# Altium PCB PCB1.PcbDoc
Units mil, origin at the board's own origin, x right, y up, seen from the top; angles counter-clockwise.
Board outline 10000 x 5964.57 mil, 2 copper layers (Top Layer, Bottom Layer); 127 components, 82 nets, 489 pads, 172 vias.
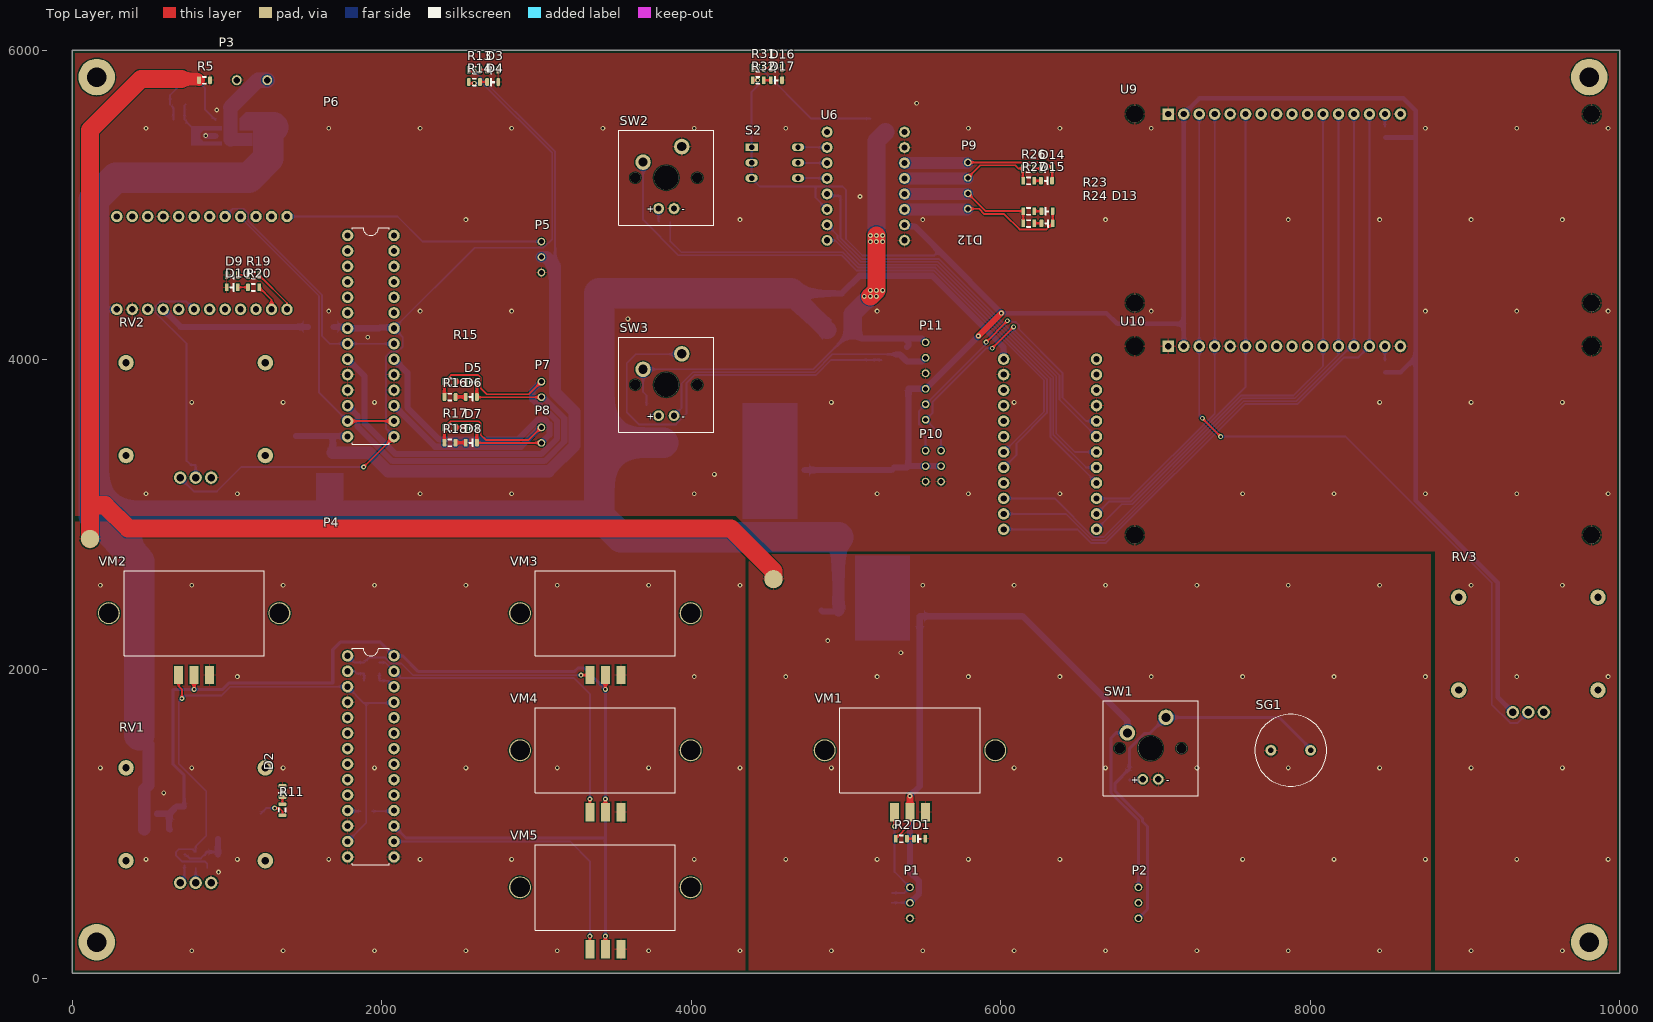
[diagram p0: Top Layer view]
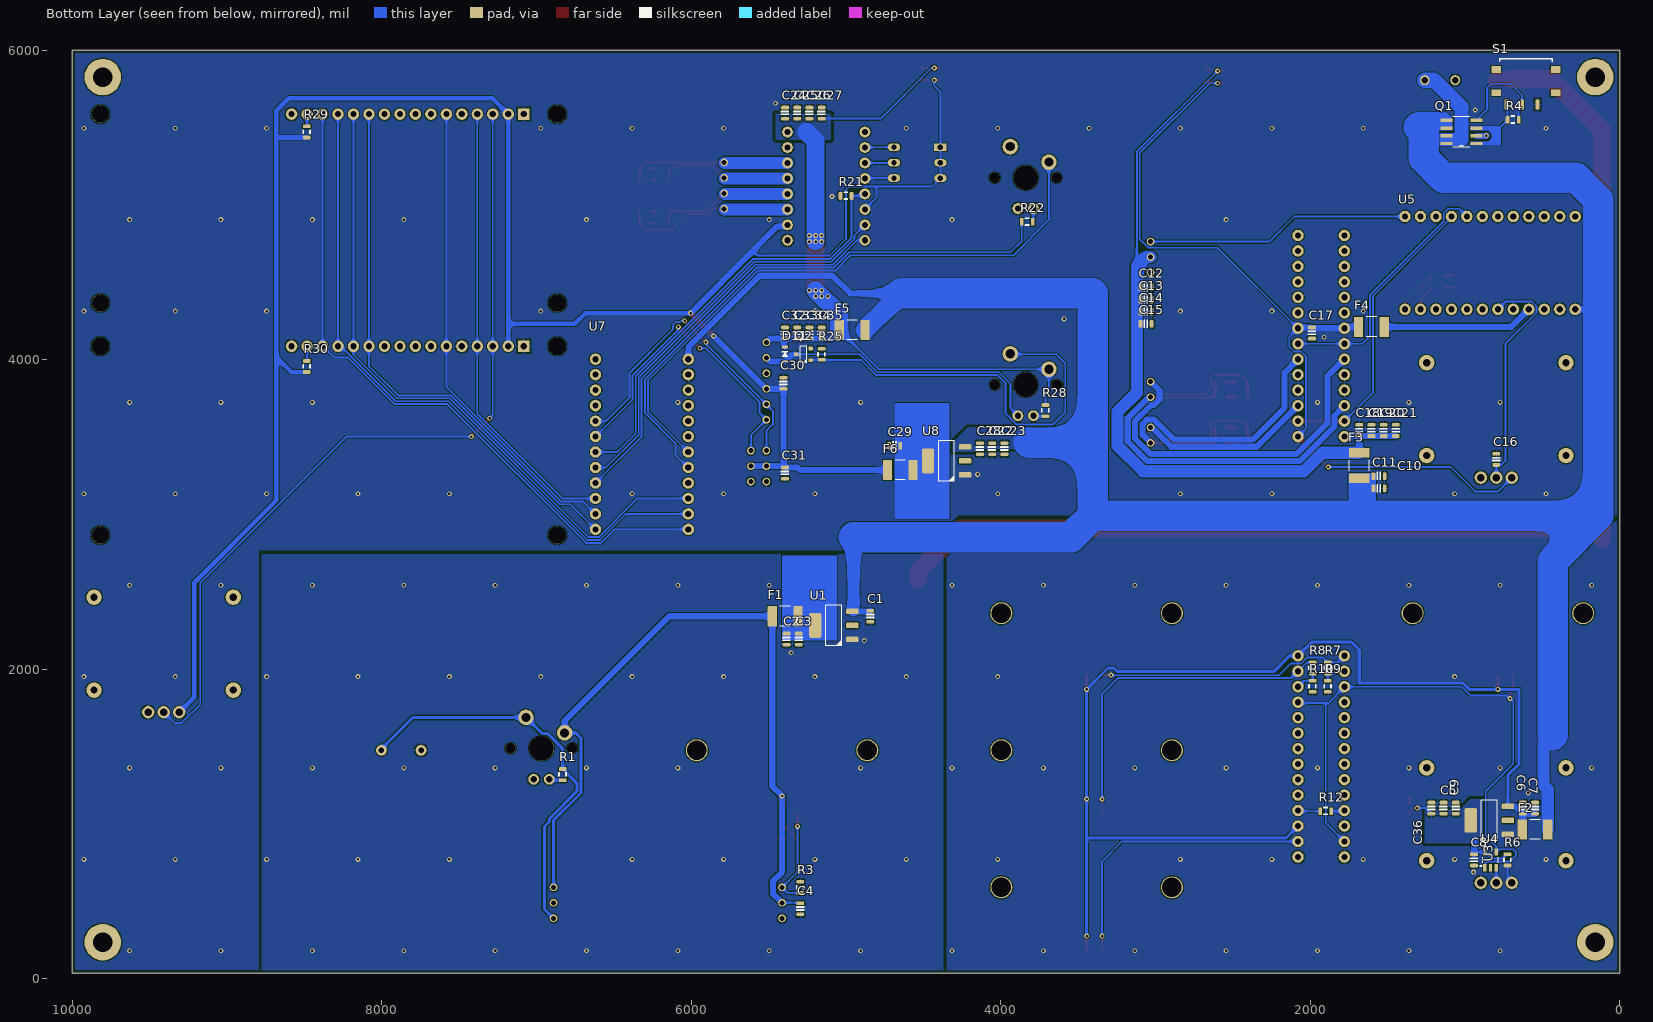
[diagram p1: Bottom Layer view, seen from below]
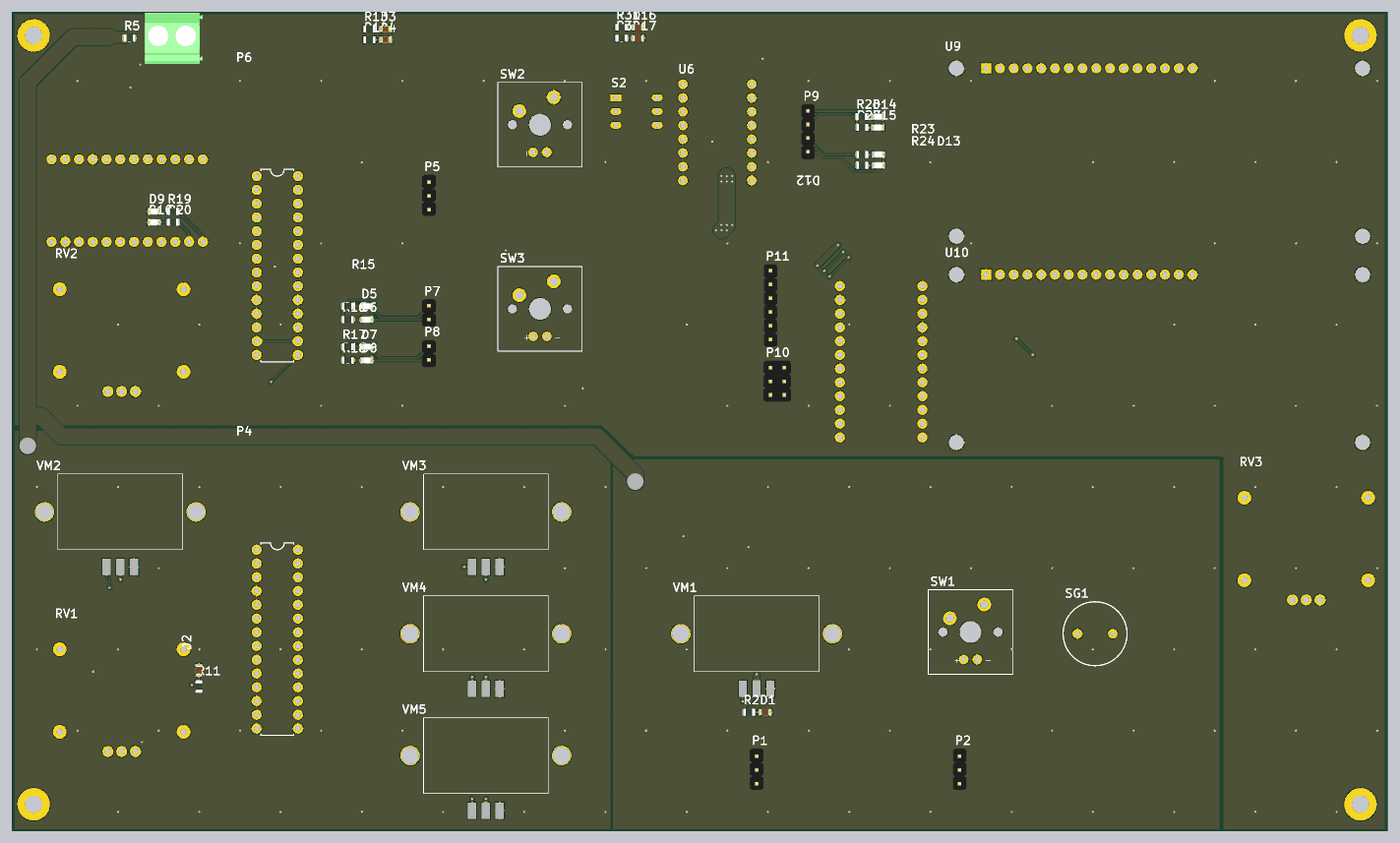
[diagram p2: 3D render of the assembled board from above, using the file's embedded part models]
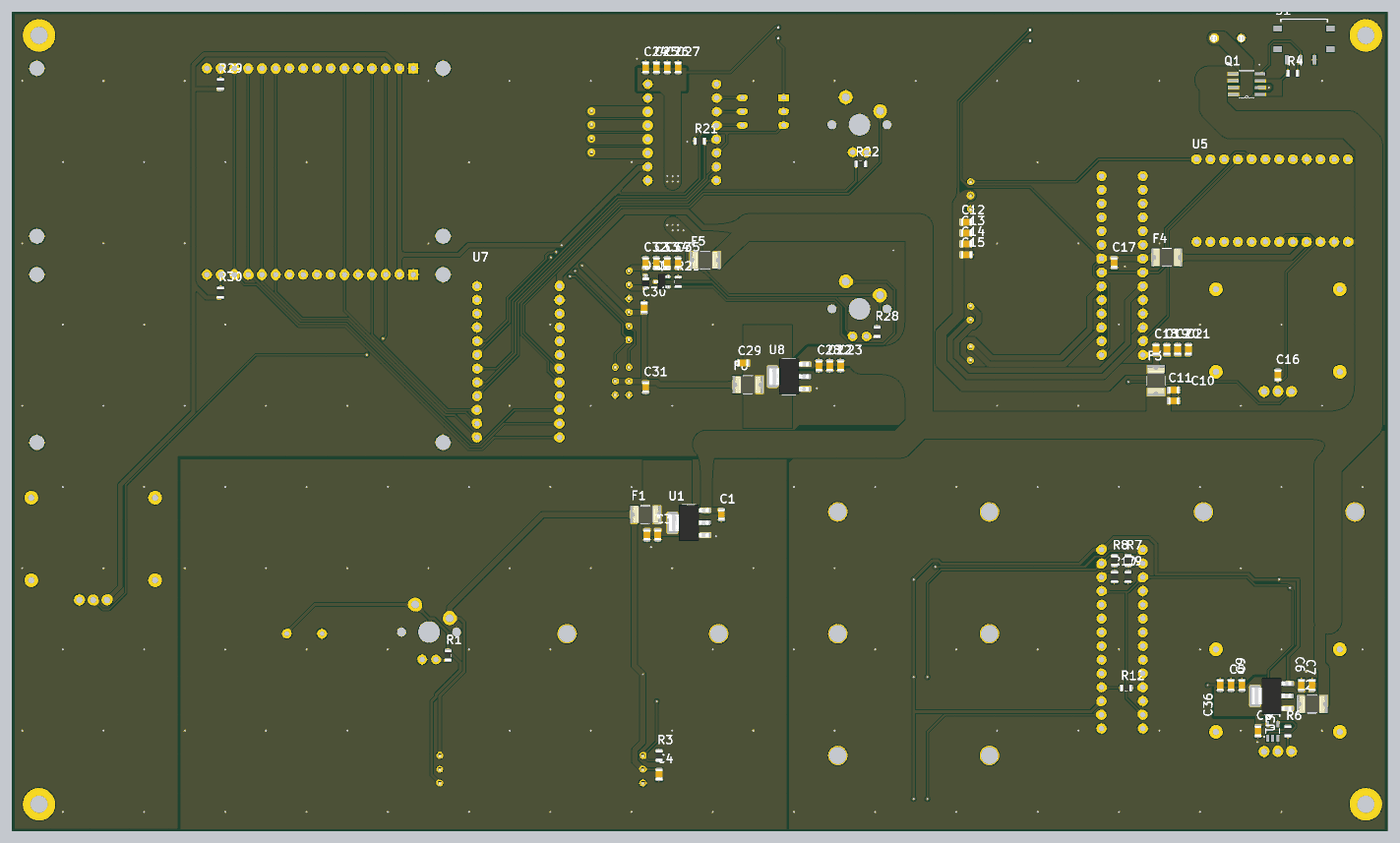
[diagram p3: 3D render of the assembled board from below, using the file's embedded part models]

## Layer stack, top to bottom
Top Solder: solder mask 0.4, Solder Resist, Dk 3.5
Top Layer: signal copper 1.4
Dielectric 1: dielectric 12.6, FR-4, Dk 4.8
Bottom Layer: signal copper 1.4
Bottom Solder: solder mask 0.4, Solder Resist, Dk 3.5

## Board outline
0,35.43 10000,35.43 10000,6000 0,6000

## Design rules (kind name [scope] priority, off if disabled: settings)
BoardOutlineClearance [InNetClass('All Nets')] p1: gap=15
Clearance Clearance_outlinepolygon [inPolygon vs OnLayer('Keep-Out Layer')] p1: gap=15.75
Clearance Clearance-polygonpolygon [InPolygon vs InPolygon] p2: gap=19.68
Clearance Clearance_2 [All] p3: gap=7
ComponentClearance [InComponent('TEENSY1')] p1: gap=-39330.71 collisioncheckmode=3 verticalgap=10 showdistances=FALSE
ComponentClearance ComponentClearance_4 [All] p2: gap=10 collisioncheckmode=3 verticalgap=10 showdistances=FALSE
HoleSize [All] p1: absolutevalues=TRUE maxlimit=236.22 minlimit=15 maxpercent=80.000 minpercent=20.000
MinimumAnnularRing ignore [(HasFootprint('LMZ21701SIL') OR HasFootprint('m3 hole') OR HasFootprint('G3T-12AH'))] p1: minimumring=0
MinimumAnnularRing [All] p2: minimumring=7
MinimumSolderMaskSliver [All] p1: minsoldermaskwidth=2.99
NetAntennae [All] p1: netantennaetolerance=78.74
PolygonConnect PolygonConnect_via [IsVia] p1: connectstyle=Direct reliefconductorwidth=10 reliefentries=4 polygonreliefangle="90 Angle" airgapwidth=10
PolygonConnect PolygonConnect_heat [HasFootprint('SOT223-3-CONNECTEDTAB')] p2: connectstyle=Direct reliefconductorwidth=10 reliefentries=4 polygonreliefangle="90 Angle" airgapwidth=10
PolygonConnect [All] p3: connectstyle=Relief reliefconductorwidth=10 reliefentries=4 polygonreliefangle="90 Angle" airgapwidth=10
RoutingVias [All] p1: holewidth=28 width=50 viastyle="Through Hole" minholewidth=28 minwidth=50 maxholewidth=28 maxwidth=50 useviatemplates=TRUE viatemplateguid#1={8A01C79A-D446-4E94-B509-13AE901DBC75} viatemplatename#1=4pcb
SilkToSilkClearance [All] p1 off: silktosilkclearance=0
SilkToSolderMaskClearance SilkToSolderMaskClearance_1 [HasFootprint('PAD-JUMPER-2-NO_YES_SILK')] p1: minsilkscreentomaskgap=0 clearancetoexposedcopper=TRUE
SilkToSolderMaskClearance [IsPad] p2: minsilkscreentomaskgap=5.91 clearancetoexposedcopper=TRUE
SolderMaskExpansion [All] p1: expansion=3
Width [All] p1: maxlimit=999 minlimit=7 preferedwidth=11.81
24 further rules are at their usual default settings.

## Classes and differential pairs
component class U_stepper: C22 C23 C24 C25 C26 C27 C28 C29 C30 C31 C32 C33 C34 C35 D11 D12 D13 D14 D15 D16 D17 F5 F6 P9 P10 P11 Q2 R21 R22 R23 R24 R25 R26 R27 R28 R29 R30 R31 R32 RV3 S2 SW2 SW3 U6 U7 U8 U9 U10
component class U_servo: C10 C11 C12 C13 C14 C15 C16 C17 C18 C19 C20 C21 D3 D4 D5 D6 D7 D8 D9 D10 F3 F4 P5 P6 P7 P8 R13 R14 R15 R16 R17 R18 R19 R20 RV2 U5
component class U_opamp: C5 C6 C7 C8 C9 C36 D2 F2 P4 R6 R7 R8 R9 R10 R11 R12 RV1 U3 U4 VM2 VM3 VM4 VM5
component class U_digital-analog-sensor: C1 C2 C3 C4 D1 F1 P1 P2 R1 R2 R3 SG1 SW1 U1 VM1
component class main: P3 Q1 R4 R5 S1

## Components (designator, comment, footprint, x,y, rotation, side; value= is the part's Value field where it differs from the comment)
C1 "Cap_0805" CAP_0805 4842.52,2342.52 r90 bottom
C2 "Cap_0805" CAP_0805 5383.86,2194.88 r90 bottom
C3 "Cap_0805" CAP_0805 5305.12,2194.88 r90 bottom
C4 "Cap_0805" CAP_0805 5295.28,452.76 r90 bottom
C5 "Cap_0805" CAP_0805 1137.93,1102.36 r270 bottom
C6 "Cap_0805" CAP_0805 626.12,1102.36 r270 bottom
C7 "Cap_0805" CAP_0805 547.38,1102.36 r270 bottom
C8 "Cap_0805" CAP_0805 941.08,767.72 r270 bottom
C9 "Cap_0805" CAP_0805 1059.19,1102.36 r270 bottom
C10 "Cap_0805" CAP_0805 1555.12,3169.29 r0 bottom
C11 "Cap_0805" CAP_0805 1555.12,3248.03 r0 bottom
C12 "Cap_0805" CAP_0805 3061.02,4468.5 r180 bottom
C13 "Cap_0805" CAP_0805 3061.02,4389.76 r180 bottom
C14 "Cap_0805" CAP_0805 3061.02,4311.02 r180 bottom
C15 "Cap_0805" CAP_0805 3061.02,4232.28 r180 bottom
C16 "Cap_0805" CAP_0805 797.24,3356.3 r90 bottom
C17 "Cap_0805" CAP_0805 1988.19,4173.23 r90 bottom
C18 "Cap_0805" CAP_0805 1683.07,3543.31 r90 bottom
C19 "Cap_0805" CAP_0805 1604.33,3543.31 r90 bottom
C20 "Cap_0805" CAP_0805 1525.59,3543.31 r90 bottom
C21 "Cap_0805" CAP_0805 1446.85,3543.31 r90 bottom
C22 "Cap_0805" CAP_0805 4055.12,3425.2 r90 bottom
C23 "Cap_0805" CAP_0805 3976.38,3425.2 r90 bottom
C24 "Cap_0805" CAP_0805 5393.7,5593.92 r90 bottom
C25 "Cap_0805" CAP_0805 5314.96,5593.92 r90 bottom
C26 "Cap_0805" CAP_0805 5236.22,5593.92 r90 bottom
C27 "Cap_0805" CAP_0805 5157.48,5593.92 r90 bottom
C28 "Cap_0805" CAP_0805 4133.86,3425.2 r90 bottom
C29 "Cap_0805" CAP_0805 4685.04,3444.88 r180 bottom
C30 "Cap_0805" CAP_0805 5403.54,3848.43 r90 bottom
C31 "Cap_0805" CAP_0805 5393.7,3267.72 r270 bottom
C32 "Cap_0805" CAP_0805 5393.7,4173.23 r90 bottom
C33 "Cap_0805" CAP_0805 5314.96,4173.23 r90 bottom
C34 "Cap_0805" CAP_0805 5236.22,4173.23 r90 bottom
C35 "Cap_0805" CAP_0805 5157.48,4173.23 r90 bottom
C36 "Cap_0805" CAP_0805 1216.67,1102.36 r270 bottom
D1 "LED_0805" LED_0805_RED 5475.81,905.51 r0 top
D2 "LED_0805" LED_0805_RED 1358.27,1210.2 r90 top
D3 "LED_0805" LED_0805_RED 2716.54,5874.02 r0 top
D4 "LED_0805" LED_0805_RED 2716.54,5795.28 r0 top
D5 "LED_0805" LED_0805_YELLOW 2578.74,3858.27 r0 top
D6 "LED_0805" LED_0805_YELLOW 2578.74,3759.84 r180 top
D7 "LED_0805" LED_0805_YELLOW 2578.74,3562.99 r0 top
D8 "LED_0805" LED_0805_YELLOW 2578.74,3464.57 r180 top
D9 "LED_0805" LED_0805_YELLOW 1033.46,4547.24 r180 top
D10 "LED_0805" LED_0805_YELLOW 1033.46,4468.5 r180 top
D11 "Diode_SOD323" SOD-323 5393.7,4035.43 r90 bottom
D12 "LED_0805" LED_0805_YELLOW 6299.21,4960.63 r0 top
D13 "LED_0805" LED_0805_YELLOW 6299.21,4881.89 r180 top
D14 "LED_0805" LED_0805_YELLOW 6295.84,5236.22 r0 top
D15 "LED_0805" LED_0805_YELLOW 6295.84,5157.48 r180 top
D16 "LED_0805" LED_0805_RED 4550.61,5885.83 r0 top
D17 "LED_0805" LED_0805_RED 4550.61,5807.09 r0 top
F1 "300ma trip" Multifuse1812 5393.7,2342.52 r180 bottom
F2 "250ma trip" Multifuse1812 547.38,964.57 r0 bottom
F3 "4A trip" Multifuse1812 1683.07,3316.93 r90 bottom
F4 "300ma trip" Multifuse1812 1604.33,4212.6 r0 bottom
F5 "4A trip" Multifuse1812 4960.63,4192.91 r0 bottom
F6 "500ma trip" Multifuse1812 4649.61,3287.4 r0 bottom
P1 "HDR1x3_2.54" HDR1X3_2.54_180 5413.39,590.55 r0 top
P2 "HDR1x3_2.54" HDR1X3_2.54_180 6889.76,590.55 r0 top
P3 "2Way_5" 2Way_5 1161.42,5807.09 r180 top
P4 "Lever-action ZIF socket for 28-pin ICs" DIL28-3-ZIF_SOCKET 1929.13,1437.01 r270 top
P5 "HDR1x3_2.54" HDR1X3_2.54_180 3031.5,4763.78 r0 top
P6 "Lever-action ZIF socket for 28-pin ICs" DIL28-3-ZIF_SOCKET 1929.13,4153.54 r270 top
P7 "HDR1x2_2.54" HDR1X2_2.54_180 3031.5,3858.27 r0 top
P8 "HDR1x2_2.54" HDR1X2_2.54_180 3031.5,3562.99 r0 top
P9 "HDR1x4_2.54" HDR1x4_2.54_180 5787.4,5275.59 r0 top
P10 "HDR2x3_2.54" HDR2X3_2.54_180 5514.57,3412.6 r0 top
P11 "HDR1x6_2.54" HDR1X6_2.54_180 5514.57,4112.6 r0 top
Q1 "PMOS" SOIC127P600X175-8N 1023.62,5472.44 r0 bottom
Q2 "NMOS" SOT23-3 5275.59,4035.43 r0 bottom
R1 "Res_0805" RES_0805 6830.71,1318.9 r90 bottom
R2 "Res_0805" RES_0805 5357.7,905.51 r180 top
R3 "weak pull down to avoid jumping values when nothing connected" RES_0805 5295.28,590.55 r270 bottom
R4 "Res" RES_0805 688.98,5551.18 r180 bottom
R5 "Res_0805" RES_0805 854.33,5807.09 r0 top
R6 "Res_0805" RES_0805 724.54,767.72 r270 bottom
R7 "Res_0805" RES_0805 1885.96,2007.87 r270 bottom
R8 "Res_0805" RES_0805 1984.39,2007.87 r270 bottom
R9 "Res_0805" RES_0805 1885.96,1889.76 r90 bottom
R10 "Res_0805" RES_0805 1984.39,1889.76 r90 bottom
R11 "Res_0805" RES_0805 1358.27,1092.09 r270 top
R12 "Res_0805" RES_0805 1899.61,1082.68 r180 bottom
R13 "Res_0805" RES_0805 2598.43,5874.02 r180 top
R14 "Res_0805" RES_0805 2598.43,5795.28 r180 top
R15 "Res_0805" RES_0805 2440.94,3858.27 r0 top
R16 "Res_0805" RES_0805 2440.94,3759.84 r0 top
R17 "Res_0805" RES_0805 2440.94,3562.99 r0 top
R18 "Res_0805" RES_0805 2440.94,3464.57 r0 top
R19 "Res_0805" RES_0805 1171.26,4547.24 r180 top
R20 "Res_0805" RES_0805 1171.26,4468.5 r180 top
R21 "Res_0805" RES_0805 5000,5059.06 r180 bottom
R22 "Res_0805" RES_0805 3828.74,4891.73 r180 bottom
R23 "Res_0805" RES_0805 6181.1,4960.63 r0 top
R24 "Res_0805" RES_0805 6181.1,4881.89 r0 top
R25 "R2" RES_0805 5157.48,4035.43 r270 bottom
R26 "Res_0805" RES_0805 6177.73,5236.22 r0 top
R27 "Res_0805" RES_0805 6181.1,5157.48 r0 top
R28 "Res_0805" RES_0805 3710.63,3671.26 r270 bottom
R29 "Res_0805" RES_0805 8484.25,5472.44 r90 bottom
R30 "Res_0805" RES_0805 8484.25,3956.69 r90 bottom
R31 "Res_0805" RES_0805 4432.5,5885.83 r180 top
R32 "Res_0805" RES_0805 4432.5,5807.09 r180 top
RV1 "POTALPS-KIT" Bourns-slimline-axialbracket 797.24,1062.99 r0 top
RV2 "center detent" Bourns-slimline-axialbracket 797.24,3681.1 r0 top
RV3 "POTALPS-KIT" Bourns-slimline-axialbracket 9409.45,2165.35 r0 top
S1 "SW-SPDT" G3T-12AH 531.5,5649.61 r270 bottom
S2 "HDR2x3_2.54" DIP6 4389.76,5374.02 r0 top
SG1 "12mm buzzer" BUZZER-12MM 7874.02,1476.38 r0 top
SW1 "CHERRY-MX-LED" MX-LED 6968.07,1488.78 r0 top
SW2 "CHERRY-MX-LED" MX-LED 3838.58,5177.17 r0 top
SW3 "CHERRY-MX-LED" MX-LED 3838.58,3838.58 r0 top
U1 "AMS1117" SOT223-3-CONNECTEDTAB 5078.74,2283.46 r90 bottom
U3 "AMS1117" SOT223-3-CONNECTEDTAB 842.65,1023.62 r90 bottom
U4 "Rail to rail OpAmp with 10MHz GBP" SOT23-5 834.65,767.72 r180 bottom
U5 "ARDUINO_PRO_MINI_NORROGRAM" ARDUINO_PRO_MINI_NOPROGRAM 787.4,4625.98 r270 bottom
U6 "Stepper-board" stepper-board 5127.99,5121.89 r0 top
U7 "ARDUINO_PRO_MINI_NORROGRAM" ARDUINO_PRO_MINI_NOPROGRAM 6318.9,3503.94 r180 bottom
U8 "AMS1117" SOT223-3-CONNECTEDTAB 4350.39,3346.46 r90 bottom
U9 "1602" LCD-16X2_NOSILK 8342.52,4977.17 r0 top
U10 "1602" LCD-16X2_NOSILK 8342.52,3477.17 r0 top
VM1 "3 wire voltimeter" led_meter_0.36 5413.39,1476.38 r0 top
VM2 "3 wire voltimeter" led_meter_0.36 787.4,2362.2 r0 top
VM3 "3 wire voltimeter" led_meter_0.36 3444.88,2362.2 r0 top
VM4 "3 wire voltimeter" led_meter_0.36 3444.88,1476.38 r0 top
VM5 "3 wire voltimeter" led_meter_0.36 3444.88,590.55 r0 top

## Footprints (in the part's own frame and the unit in brackets; to place one, negate y for a bottom-side part, rotate by r counter-clockwise, add the part's x,y. Pads: shape width x height; smd on the part's side, far side on the other; paste and mask are expansions set on the pad)
2Way_5 [mil]
  round 64 hole 44: 1(-98.43,0) 2(98.43,0)
  body extent -225,-185 198,189, height 591
ARDUINO_PRO_MINI_NOPROGRAM [mil]
  round 74 hole 40: 1(-300,500) 2(-300,400) 3(-300,300) 4(-300,200) 5(-300,100) 6(-300,0) 7(-300,-100) 8(-300,-200) 9(-300,-300) 10(-300,-400) 11(-300,-500) 12(-300,-600) 13(300,-600) 14(300,-500) 15(300,-400) 16(300,-300) 17(300,-200) 18(300,-100) 19(300,0) 20(300,100) 21(300,200) 22(300,300) 23(300,400) 24(300,500)
Bourns-slimline-axialbracket [mil]
  round 100 hole 47: 0(-450,-300) 0(-450,300) 0(450,-300) 0(450,300)
  round 80 hole 47: 1(-100,-443) 2(0,-443) 3(100,-443)
BUZZER-12MM [mil]
  round 70 hole 35.43: +(127.95,0) -(-127.95,0)
  silkscreen extent -232,-232 232,232
CAP_0805 [mil]
  rrect50% 24x50 smd: 1(-36,0) 2(36,0)
  silkscreen extent -12,-24 12,24, body extent -39,-25 39,25, height 39
DIL28-3-ZIF_SOCKET [mil]
  round 74 hole 40: 1(-650,-150) 2(-550,-150) 3(-450,-150) 4(-350,-150) 5(-250,-150) 6(-150,-150) 7(-50,-150) 8(50,-150) 9(150,-150) 10(250,-150) 11(350,-150) 12(450,-150) 13(550,-150) 14(650,-150) 15(650,150) 16(550,150) 17(450,150) 18(350,150) 19(250,150) 20(150,150) 21(50,150) 22(-50,150) 23(-150,150) 24(-250,150) 25(-350,150) 26(-450,150) 27(-550,150) 28(-650,150)
  silkscreen extent -700,-120 700,120
DIP6 [mil]
  rect 80x50 hole 35: 1(0,0)
  oval 80x50 hole 35: 2(0,-100) 3(0,-200) 4(300,-200) 5(300,-100) 6(300,0)
G3T-12AH [mm]
  rect 1.1x1.55 smd: 0(-5.75,-6.78) 0(-5.75,2.97) 0(-1.95,-6.78) 0(-1.95,2.97)
  rect 1.7x0.7 smd: 1(0,0) 2(0,-2.54) 3(0,-5.08)
  silkscreen extent -7.5,-6.2 -7,2.4
HDR1X2_2.54_180 [mil]
  round 50 hole 32: 1(0,0) 2(0,-100)
  body extent -49,-150 49,50, height 323
HDR1X3_2.54_180 [mil]
  round 50 hole 32: 1(0,0) 2(0,-100) 3(0,-200)
  body extent -49,-250 49,50, height 323
HDR1x4_2.54_180 [mil]
  round 50 hole 32: 1(0,0) 2(0,-100) 3(0,-200) 4(0,-300)
  body extent -49,-350 49,50, height 323
HDR1X6_2.54_180 [mil]
  round 50 hole 32: 1(0,0) 2(0,-100) 3(0,-200) 4(0,-300) 5(0,-400) 6(0,-500)
  body extent -49,-550 49,50, height 323
HDR2X3_2.54_180 [mil]
  round 50 hole 32: 1(0,0) 2(100,0) 3(0,-100) 4(100,-100) 5(0,-200) 6(100,-200)
  body extent -50,-250 150,50, height 335
LCD-16X2_NOSILK [mil]
  round 110.24 hole 110.24: 1(-1476.38,-610.24) 1(-1476.38,610.24) 1(1476.38,-610.24) 1(1476.38,610.24)
  rect 74x74 hole 40: 1(-1259.84,610.24)
  round 74 hole 40: 2(-1159.84,610.24) 3(-1059.84,610.24) 4(-959.84,610.24) 5(-859.84,610.24) 6(-759.84,610.24) 7(-659.84,610.24) 8(-559.84,610.24) 9(-459.84,610.24) 10(-359.84,610.24) 11(-259.84,610.24) 12(-159.84,610.24) 13(-59.84,610.24) 14(40.16,610.24) 15(140.16,610.24) 16(240.16,610.24)
LED_0805_RED [mil]
  rrect50% 24x50 smd: 1(-36,0) 2(36,0)
  silkscreen extent -12,-24 12,24, body extent -40,-25 40,25, height 43
LED_0805_YELLOW [mil]
  rrect50% 24x50 smd: 1(-36,0) 2(36,0)
  silkscreen extent -12,-24 12,24, body extent -40,-25 40,25, height 43
led_meter_0.36 [mm]
  round 3.6 hole 3.2: 0(-14,0) 0(14,0)
  rect 1.5x3 smd: 1(-2.54,-10.16) 2(0,-10.16) 3(2.54,-10.16)
  silkscreen extent -11.5,-7 11.5,7
Multifuse1812 [mm]
  rect 1.5x3.3 smd: 1(-2.1,0) 2(2.1,0)
  silkscreen extent -0.85,-1.63 0.85,1.63, body extent -2.41,-1.61 2.41,1.61, height 1.32
MX-LED [mil]
  round 67 hole 67: 1(-200,0)
  round 158 hole 158: 1(0,0)
  round 66.93 hole 66.93: 1(200,0)
  round 100 hole 59: P$1(100,200) P$2(-150,100)
  round 70 hole 40: P$3(50,-200) P$4(-50,-200)
  silkscreen extent -307,-307 307,307
RES_0805 [mil]
  rrect50% 24x50 smd: 1(-36,0) 2(36,0)
  silkscreen extent -12,-24 12,24, body extent -39,-25 39,25, height 24
SOD-323 [mil]
  rrect50% 20x40 smd: 1(-46,0) 2(46,0)
  silkscreen extent -16,-18 16,18, body extent -51,-27 51,27, height 43
SOIC127P600X175-8N [mil]
  rect 78x22 smd paste-1000 mask-1000: 1(-97,75) 2(-97,25) 3(-97,-25) 4(-97,-75) 5(97,-75) 6(97,-25) 7(97,25) 8(97,75)
  silkscreen extent -54,-98 54,98
SOT23-3 [mil]
  rrect50% 30x24 smd: 1(-47,38) 2(-47,-38) 3(47,0)
  silkscreen extent -21,-53 21,53, body extent -55,-57 55,57, height 51
SOT23-5 [mil]
  rect 21.65x47.24 smd: 1(-37.4,-51.19) 2(0,-51.19) 3(37.4,-51.19) 4(37.4,51.19) 5(-37.4,51.19)
  silkscreen extent -68,-45 50,28
SOT223-3-CONNECTEDTAB [mil]
  rrect40% 36x80 smd: 1(-90.16,-120) 2(0,-120) 3(90.16,-120)
  rrect30% 160x80 smd: 2(0,120)
  silkscreen extent -131,-51 131,51, body extent -132,-144 132,144, height 71
stepper-board [mil]
  round 70 hole 40: 1(-250,350) 2(-250,250) 3(-250,150) 4(-250,50) 5(-250,-50) 6(-250,-150) 7(-250,-250) 8(-250,-350) 9(250,-350) 10(250,-250) 11(250,-150) 12(250,-50) 13(250,50) 14(250,150) 15(250,250) 16(250,350)

## Part data
C1 C2 C3 C4 C5 C6 C7 C8 C9 C10 C11 C12 C13 C14 C15 C16 C17 C18 C19 C20 C21 C22 C23 C24 C25 C26 C27 C28 C29 C30 C31 C32 C33 C34 C35 C36: "Capacitor"
D1 D2 D3 D4 D5 D6 D7 D8 D9 D10 D12 D13 D14 D15 D16 D17: "LED"
D11: "Diode"
F1 F2 F3 F4 F5 F6: "RO ZEK MULTI 500MA SMD 1812 MF-MSMF050-2 BOURNS"
P1 P2 P5 P7 P8 P9 P10 P11 S2: "Header"
P3: "DB"
P4 P6: library part ZIFSOCKET-28-3ZIFFSOCKET-28-3
Q1: library part IRF7316, "Dual PMOS"
Q2: library part MOSFET-N, "N-Channel MOSFET"
R1 R2 R5 R6 R7 R8 R9 R10 R11 R12 R13 R14 R15 R16 R17 R18 R19 R20 R21 R22 R23 R24 R26 R27 R28 R29 R30 R31 R32: "Resistor"
R3: library part Res_0805, "Resistor"
R4 R25: library part Res1, "Resistor"
RV2: library part POTALPS-KIT
S1: "SPDT Subminiature Toggle Switch, Right Angle Mounting, Vertical Actuation"
SG1: library part BUZZERPTH
U1 U3 U8: "Power"
U4: library part MCP6291T-E/OT
U9 U10: library part LCD-16X2NOSILK
VM1 VM2 VM3 VM4 VM5: library part Voltmeter_LED_3wire

## Free pads (board coordinates)
  round 118.11 smd: 0(114.17,2842.52) 0(4531.5,2582.68)
  round 236.22 hole 125.98: 0(157.48,236.22) 2(157.48,5826.77) 3(9803.15,5826.77) 4(9803.15,236.22)

## Via types
v1: diameter 31.5, hole 15.75, Top Layer to Bottom Layer, tented both sides, 172 vias

## Nets (pads, with @x,y where several pads share a name; then routed paths per layer and width w, separated by ;. In a path a pad name is that pad's centre, name@x,y a point inside that pad or via, vN(x,y) a via of type N, cw(c..) or ccw(c..) an arc to the next point about the centre after c; other vN are vias at no path point)
1A: P9.3 R23.1 R24.1 U6.12 | length 889.8
  Top Layer w11.81: P9.3 5902.36,4960.63 R23.1 R24.1
  Bottom Layer w78.74: U6.12 P9.3@5783.7,5071.89
1B: D12.2 D13.1 P9.4 U6.11 | length 1103.7
  Top Layer w11.81: P9.4 5860.8,4975.59 5894.57,4941.82 6022.75,4941.82 6122.05,4842.52 6295.84,4842.52 D13.1 D12.2
  Bottom Layer w78.74: U6.11 P9.4@5783.7,4971.89
1Y: P6.9 P7.1 R15.1 R16.1 | length 3163.4
  Top Layer w11.81: R15.1 2448.25,3901.57 2623.17,3901.57 2639.65,3885.1 2639.65,3817.05 2679.61,3777.08 2950.31,3777.08 P7.1
  Top Layer w19.68: R16.1 R15.1
  Bottom Layer w39.37: P6.9 1889.19,3893.49 1889.19,3589.77 2087.45,3391.51 3033.11,3391.51 3132.76,3491.17 3132.76,3602.84 3029.02,3706.58 3010.09,3706.58 2972.44,3744.23 2972.44,3799.21 P7.1
2A: P9.2 R26.1 R27.1 U6.13 | length 882.3
  Top Layer w11.81: P9.2 5868.59,5256.78 6092.52,5256.78 6113.08,5236.22 R26.1 6141.73,5160.85 R27.1
  Bottom Layer w78.74: U6.13 P9.2@5783.7,5171.89
2B: D14.2 D15.1 P9.1 U6.14 | length 1045.2
  Top Layer w11.81: P9.1 6292.47,5275.59 D14.2 D15.1
  Bottom Layer w78.74: U6.14 P9.1@5783.7,5271.89
2Y: D5.2 D6.1 P6.12 P7.2 | length 2511.6
  Top Layer w11.81: D6.1 2616.32,3758.27 P7.2
  Top Layer w19.68: D6.1 D5.2
  Bottom Layer w39.37: P6.12 1842.82,3639.86 1842.82,3570.57 2068.24,3345.14 3052.32,3345.14 3179.13,3471.96 3179.13,3622.05 3042.91,3758.27 P7.2
3Y: P6.17 P8.1 R17.1 R18.1 | length 1983.6
  Top Layer w11.81: R17.1 2444.32,3602.36 2627.11,3602.36 2639.65,3589.82 2639.65,3513.9 2671.74,3481.8 2950.31,3481.8 P8.1
  Top Layer w19.68: R18.1 R17.1
  Bottom Layer w39.37: P6.17 2344.8,3437.88 2898.87,3437.88 3023.98,3562.99 P8.1
4Y: D7.2 D8.1 P6.20 P8.2 | length 2079.2
  Top Layer w11.81: D8.1 2616.32,3462.99 P8.2
  Top Layer w19.68: D8.1 D7.2 ; P8.2@3029.92,3464.57 P8.2
  Bottom Layer w39.37: P6.20 2165.35,3917.32 2165.35,3690.94 2372.05,3484.25 2879.66,3484.25 3010.09,3614.68 3052.9,3614.68 3083.18,3584.4 3083.18,3514.68 P8.2
-IN1: P4.2 R7.2 R9.2 | length 159.2
  Bottom Layer w11.81: P4.2 1824.02,1987.01 1839.15,1971.87 R7.2 R9.2
-IN2: P4.26 R8.2 R10.2 | length 156.9
  Bottom Layer w11.81: R8.2 R10.2 2040.38,1925.76 P4.26
AGND: C1.1 C2.1 C3.1 C4.1 C5.1 C6.1 C7.1 C8.2 C9.1 C36.1 D1.2 D2.2 P1.3 P4.4 P4.12 P4.14 P4.15 pad.0@114.17,2842.52 pad.0@4531.5,2582.68 R3.1 R5.1 R9.1 R10.1 RV1.3 SG1.- SW1.P$3 U1.1 U3.1 U4.2 VM1.3 VM2.3 VM3.3 VM4.3 VM5.3 | length 8132.4
  Top Layer w78.74: 704.72,5814.96 810.46,5814.96 R5.1
  Top Layer w118.11: pad.0@114.17,2842.52 114.17,3055.12 118.11,3059.06 ; 704.72,5814.96 444.88,5814.96 114.17,5484.25 114.17,3059.06 212.6,3059.06 362.2,2909.45 4255.91,2909.45 4531.5,2633.86 pad.0@4531.5,2582.68
  other v1: 771.65,181.1 1362.2,181.1 1952.76,181.1 2543.31,181.1 3133.86,181.1 3724.41,181.1 4314.96,181.1 4905.51,181.1 5496.06,181.1 6086.61,181.1 6677.17,181.1 7267.72,181.1 7858.27,181.1 8448.82,181.1 944.88,688.98 476.38,771.65 1066.93,771.65 1657.48,771.65 2248.03,771.65 2838.58,771.65 4019.69,771.65 4610.24,771.65 5200.79,771.65 5791.34,771.65 6381.89,771.65 7562.99,771.65 8153.54,771.65 8744.09,771.65 590.55,1200.79 181.1,1362.2 771.65,1362.2 1362.2,1362.2 1952.76,1362.2 2543.31,1362.2 3133.86,1362.2 3724.41,1362.2 4314.96,1362.2 4905.51,1362.2 6086.61,1362.2 6677.17,1362.2 7267.72,1362.2 7858.27,1362.2 8448.82,1362.2 1066.93,1952.76 4019.69,1952.76 4610.24,1952.76 5200.79,1952.76 5791.34,1952.76 6381.89,1952.76 6972.44,1952.76 7562.99,1952.76 8153.54,1952.76 8744.09,1952.76 5354.33,2106.3 4881.89,2185.04 181.1,2543.31 771.65,2543.31 1362.2,2543.31 1952.76,2543.31 2543.31,2543.31 3133.86,2543.31 3724.41,2543.31 4314.96,2543.31 5496.06,2543.31 6086.61,2543.31 6677.17,2543.31 7267.72,2543.31 7858.27,2543.31 8448.82,2543.31
DIR: U6.8 U7.9 | length 2611.2
  Bottom Layer w11.81: U6.8 4928.84,4771.89 5086.34,4614.39 5585.38,4614.39 6320.65,3879.13 6320.65,3502.19 U7.9
ENC1: P10.1 P11.5 U7.5 | length 2045.7
  Top Layer w11.81: v1(5905.51,4114.17) v1(6043.31,4251.97)
  Bottom Layer w11.81: P10.1 5514.57,3540.55 5472.44,3582.68 5472.44,3670.47 P11.5 5905.51,4103.54 v1(5905.51,4114.17) ; v1(6043.31,4251.97) 6062.99,4251.97 6070.87,4244.09 6098.43,4244.09 6118.11,4224.41 6118.11,4196.85 6398.34,3916.62 6398.34,3759.14 6553.54,3603.94 U7.5
ENC2: P10.2 P11.6 U7.6 | length 2031.4
  Top Layer w11.81: v1(5944.87,4074.8) v1(6082.67,4212.6)
  Bottom Layer w11.81: P10.2 5614.57,3512.6 P11.6 5559.95,3657.99 5559.95,3729.25 5905.5,4074.8 v1(5944.87,4074.8) ; v1(6082.67,4212.6) 6082.67,4198.88 6081.69,4197.89 6379.52,3900.06 6379.52,3743.31 U7.6
GND: C10.1 C11.1 C12.2 C13.2 C14.2 C15.2 C16.2 C17.1 C18.2 C19.2 C20.2 C21.2 C22.1 C23.1 C24.2 C25.2 C26.2 C27.2 C28.1 C29.1 C30.2 C31.2 C32.2 C33.2 C34.2 C35.2 D3.2 D4.2 D9.2 D10.2 D16.2 D17.2 P3.2 P5.3 P6.10 P6.11 P6.18 P6.19 P10.5 P10.6 P11.3 Q1.2 Q2.2 R5.2 R21.1 R25.1 RV2.3 RV3.3 S1.1 SW2.P$1 SW2.P$3 U5.4 U5.23 U6.9 U6.15 U7.4 U7.23 U8.1 U9.1 U9.5 U9.16 U10.1 U10.5 U10.16 | length 65
  Bottom Layer w39.37: v1(862.2,5448.82) 863.58,5447.44 Q1.2
  other v1: 9039.37,181.1 9629.92,181.1 9334.65,771.65 9925.2,771.65 9039.37,1362.2 9629.92,1362.2 9334.65,1952.76 9925.2,1952.76 9039.37,2543.31 9629.92,2543.31 476.38,3133.86 1066.93,3133.86 2248.03,3133.86 2838.58,3133.86 4019.69,3133.86 5200.79,3133.86 5791.34,3133.86 6381.89,3133.86 7562.99,3133.86 8153.54,3133.86 8744.09,3133.86 9334.65,3133.86 9925.2,3133.86 4149.61,3259.84 771.65,3724.41 1362.2,3724.41 1952.76,3724.41 4905.51,3724.41 6086.61,3724.41 8448.82,3724.41 9039.37,3724.41 9629.92,3724.41 1909.45,4145.67 3590.55,4263.78 1657.48,4314.96 2248.03,4314.96 2838.58,4314.96 5200.79,4314.96 6972.44,4314.96 8744.09,4314.96 9334.65,4314.96 9925.2,4314.96 2543.31,4905.51 4314.96,4905.51 5496.06,4905.51 6677.17,4905.51 7858.27,4905.51 8448.82,4905.51 9039.37,4905.51 9629.92,4905.51 5090.55,5055.12 476.38,5496.06 1657.48,5496.06 2248.03,5496.06 2838.58,5496.06 3429.13,5496.06 4019.69,5496.06 4610.24,5496.06 5791.34,5496.06 6381.89,5496.06 6972.44,5496.06 8744.09,5496.06 9334.65,5496.06 9925.2,5496.06 933.07,5614.17 5456.69,5657.48
HBRIDGE_IN1: P6.8 P6.21 U5.8 | length 1659
  Bottom Layer w11.81: U5.8 1037.31,4975.89 1108.07,4975.89 1137.31,4946.66 1137.31,4896.16 1613.3,4420.17 1613.3,4154.42 1664.17,4103.54 P6.8 P6.21
HBRIDGE_IN2: P6.13 P6.16 U5.9 | length 1909
  Top Layer w11.81: P6.13 P6.16
  Bottom Layer w11.81: U5.9 1087.4,4919.46 1594.49,4412.37 1594.49,3788.19 P6.13
HBRIDGE_LED1: R19.1 U5.13 | length 295.9
  Top Layer w11.81: R19.1 1387.4,4367.1 U5.13
HBRIDGE_LED2: R20.1 U5.14 | length 175.7
  Top Layer w11.81: R20.1 1287.4,4388.36 U5.14
LCD_7: U7.10 U9.4 U10.4 | length 2926
  Bottom Layer w11.81: U7.10 6834.25,3103.94 7382.68,3652.36 U10.4 U9.4
LCD_8: U7.11 U9.6 U10.6 | length 3065.8
  Bottom Layer w11.81: U7.11 6700.09,3085.13 6842.04,3085.13 7582.68,3825.76 U10.6 U9.6
LCD_9: U7.12 U9.11 U10.11 | length 3529.4
  Bottom Layer w11.81: U7.12 6781.28,3066.32 6849.84,3066.32 7553.21,3769.69 7893.7,3769.69 8082.68,3958.66 U10.11 U9.11
LCD_10: U7.13 U9.14 U10.14 | length 4426.5
  Bottom Layer w11.81: U7.13 6495.12,2903.94 6582.64,2816.41 6679.74,2816.41 7576.58,3713.25 7917.08,3713.25 8219.57,4015.75 8311.02,4015.75 U10.14 U9.14
LCD_11: U7.14 U9.13 U10.13 | length 4352.3
  Bottom Layer w11.81: U7.14 6421.72,3003.94 6590.43,2835.22 6671.95,2835.22 7568.79,3732.06 7909.28,3732.06 8264.63,4087.41 U10.13 U9.13
LCD_12: U7.15 U9.12 U10.12 | length 4310.6
  Bottom Layer w11.81: U7.15 6348.32,3103.94 6598.23,2854.03 6664.15,2854.03 7561,3750.87 7901.49,3750.87 8182.68,4032.06 U10.12 U9.12
NetC2_2: C2.2 C3.2 F1.2 U1.2
NetC4_2: C4.2 F1.1 P1.2 P2.1 R2.2 SW1.P$2 VM1.2 | length 5216
  Top Layer w11.81: R2.2 5413.39,997.2 VM1.2
  Top Layer w39.37: VM1.2 v1(5413.39,1181.1)
  Bottom Layer w11.81: C4.2 5297.07,490.55 P1.2
  Bottom Layer w19.68: SW1.P$2 6746.26,1588.78 6712.6,1555.12 6712.6,1200.79 6889.76,1023.62 P2.1
  Bottom Layer w39.37: P1.2 5472.44,549.61 5472.44,629.92 5413.39,688.98 v1(5413.39,1181.1) 5476.38,1244.09 F1.1 6141.73,2342.52 6818.07,1666.18 SW1.P$2
NetC29_2: C29.2 F6.1 U8.2
NetD1_1: D1.1 R2.1 | length 46.1
  Top Layer w11.81: R2.1 D1.1
NetD2_1: D2.1 R11.1 | length 46.1
  Top Layer w11.81: R11.1 D2.1
NetD3_1: D3.1 R13.1 | length 46.1
  Top Layer w11.81: R13.1 D3.1
NetD4_1: D4.1 R14.1 | length 46.1
  Top Layer w11.81: R14.1 D4.1
NetD5_1: D5.1 R15.2 | length 65.8
  Top Layer w19.68: R15.2 D5.1
NetD6_2: D6.2 R16.2 | length 65.8
  Top Layer w19.68: R16.2 D6.2
NetD7_1: D7.1 R17.2 | length 65.8
  Top Layer w19.68: R17.2 D7.1
NetD8_2: D8.2 R18.2 | length 65.8
  Top Layer w19.68: R18.2 D8.2
NetD9_1: D9.1 R19.2 | length 65.8
  Top Layer w11.81: D9.1 R19.2
NetD10_1: D10.1 R20.2 | length 65.8
  Top Layer w11.81: D10.1 R20.2
NetD11_1: D11.1 P11.2 Q2.3 SW3.P$3 | length 1911.9
  Bottom Layer w11.81: SW3.P$3 3937.01,3687.01 3937.01,3845.5 4011.28,3919.77 4796.77,3919.77 4912.43,4035.43 Q2.3
  Bottom Layer w39.37: Q2.3 5347.7,4035.43 D11.1 5491.4,3989.43 P11.2
NetD12_1: D12.1 R23.2 | length 46.1
  Top Layer w11.81: R23.2 D12.1
NetD13_2: D13.2 R24.2 | length 46.1
  Top Layer w11.81: R24.2 D13.2
NetD14_1: D14.1 R26.2 | length 46.1
  Top Layer w11.81: R26.2 D14.1
NetD15_2: D15.2 R27.2 | length 42.7
  Top Layer w11.81: R27.2 D15.2
NetD16_1: D16.1 R31.1 | length 46.1
  Top Layer w11.81: R31.1 D16.1
NetD17_1: D17.1 R32.1 | length 46.1
  Top Layer w11.81: R32.1 D17.1
NetF4_1: F4.1 U5.21 | length 981.2
  Bottom Layer w39.37: U5.21 700.79,4212.6 F4.1
NetP1_1: P1.1 R3.2 VM1.1 | length 660.3
  Top Layer w11.81: v1(5313.39,984.25) VM1.1
  Bottom Layer w11.81: R3.2 5377.39,554.55 P1.1 5313.39,690.55 v1(5313.39,984.25)
NetP2_3: P2.3 R1.2 SG1.+ SW1.P$1 | length 2594.1
  Bottom Layer w19.68: P2.3 6948.82,449.61 6948.82,984.25 6916.45,1016.62 6916.45,1034.68 6739.28,1211.84 6739.28,1263.47 R1.2 6830.71,1486.96 6928.37,1584.62 6963.91,1584.62 SW1.P$1 7799.41,1688.78 8001.97,1486.22 SG1.+
NetP3_1: P3.1 Q1.7 Q1.8 | length 516.3
  Bottom Layer w90.55: 1023.62,5423.23 1023.62,5629.92
  Bottom Layer w98.43: 1023.62,5629.92 1200.79,5807.09 P3.1
NetP4_11: P4.11 R12.2 | length 86.3
  Bottom Layer w11.81: P4.11 1783.46,1082.68 R12.2
NetP4_16: P4.16 VM5.1 | length 1887.5
  Top Layer w11.81: VM5.1 v1(3344.88,275.59)
  Bottom Layer w11.81: P4.16 3217.32,887.01 3344.88,759.45 v1(3344.88,275.59)
NetP4_18: P4.18 R12.1 | length 145.3
  Bottom Layer w11.81: R12.1 2074.8,1082.68 P4.18
NetQ1_1: Q1.1 Q1.3 R4.1 S1.3 | length 325
  Bottom Layer w11.81: S1.3 724.98,5643.09 R4.1 778.72,5497.44 Q1.3
NetQ1_4: Q1.4 R4.2 S1.2 | length 673.2
  Bottom Layer w11.81: R4.2 652.98,5628.13 S1.2 631.5,5710.24 704.72,5783.46 830.71,5783.46 858.27,5755.91 858.27,5615.8 Q1.4
NetQ2_2: Q2.1 R25.2 SW3.P$1 | length 2665.6
  Bottom Layer w11.81: SW3.P$1 3935.43,4035.43 3641.73,4035.43 3582.68,3976.38 3582.68,3661.42 3661.42,3582.68 3900.43,3582.68 3936.49,3618.74 3936.49,3621.53 3969.99,3655.03 3969.99,3851.88 4019.07,3900.96 4804.56,3900.96 4903.03,3999.43 R25.2 5226.59,3999.43 Q2.1
NetR1_1: R1.1 SW1.P$4 | length 89.8
  Bottom Layer w19.68: R1.1 6912.19,1282.9 SW1.P$4
NetR6_2: R6.2 RV1.1 | length 136.6
  Bottom Layer w11.81: RV1.1 724.54,647.29 R6.2 ; RV1.1@714.96,619.99 RV1.1@724.54,629.58
NetR22_1: R22.1 U7.17 | length 3614.4
  Bottom Layer w11.81: R22.1 3864.74,4767.15 3937.01,4694.88 4979.25,4694.88 5078.55,4595.58 5577.59,4595.58 6298.34,3874.83 6298.34,3656.78 6102.36,3460.8 6102.36,3387.4 U7.17
NetR22_2: R22.2 SW2.P$4 | length 87.2
  Bottom Layer w11.81: SW2.P$4 3788.58,4895.89 R22.2
NetR28_2: R28.2 SW3.P$4 | length 79.3
  Bottom Layer w11.81: R28.2 3785.26,3635.26 SW3.P$4
NetR29_2: R29.2 U9.15 | length 79.6
  Bottom Layer w11.81: U9.15 8482.68,5510.01 R29.2
NetR30_2: R30.2 U10.15 | length 93.1
  Bottom Layer w11.81: R30.2@8482.68,3994.27 U10.15
NetRV1_P$2: RV1.2 U4.3 | length 96.5
  Bottom Layer w11.81: RV1.2 U4.3
NetRV3_P$2: RV3.2 U9.3 U10.3 | length 5385.4
  Top Layer w11.81: v1(7303.15,3622.05) v1(7421.26,3503.94)
  Bottom Layer w11.81: U9.3 U10.3 7282.68,3642.52 v1(7303.15,3622.05) ; v1(7421.26,3503.94) 8228.59,3503.94 9173.23,2559.3 9173.23,1771.65 9291.34,1653.54 9340.64,1653.54 RV3.2
NetS2_2: S2.6 U6.2 | length 192.1
  Top Layer w11.81: U6.2@4875.87,5374.02 U6.2
  Bottom Layer w11.81: S2.6 4875.87,5374.02 U6.2
NetS2_4: S2.5 U6.3 | length 192.1
  Top Layer w11.81: U6.3@4875.87,5274.02 U6.3
  Bottom Layer w11.81: S2.5 4691.89,5271.89 U6.3
NetS2_6: S2.4 U6.4 | length 192.1
  Top Layer w11.81: U6.4@4875.87,5174.02 U6.4
  Bottom Layer w11.81: S2.4 4875.87,5174.02 U6.4
NetSW2_P$2: SW2.P$2 U7.18 | length 3964.7
  Bottom Layer w11.81: SW2.P$2 3688.58,4903.94 3917.32,4675.2 4972.33,4675.2 5070.75,4576.77 5569.8,4576.77 6279.53,3867.04 6279.53,3664.57 U7.18
OUT1: P4.1 R7.1 VM3.1 | length 1645.3
  Top Layer w11.81: v1(3287.4,1962.2) VM3.1
  Bottom Layer w11.81: P4.1 1822.27,2043.87 R7.1 1918.86,2076.77 2018.79,2076.77 2058.46,2037.1 2126.28,2037.1 2201.88,1961.5 3286.7,1961.5 v1(3287.4,1962.2)
OUT2: P4.27 R8.1 VM4.1 | length 2209.8
  Top Layer w11.81: VM4.1 v1(3344.88,1161.42)
  Bottom Layer w11.81: R8.1 2022.27,2043.87 P4.27 2123.45,1942.69 3244.31,1942.69 3344.88,1842.13 v1(3344.88,1161.42)
POT_OUT: P4.3 P4.13 P4.25 U4.1 U4.4 VM2.1 | length 4070.1
  Top Layer w11.81: VM2.1 687.4,1891.34 708.66,1870.08 v1(708.66,1811.02)
  Bottom Layer w11.81: U4.1 872.05,742.13 856.3,757.87 708.66,757.87 669.29,797.24 669.29,816.93 688.98,836.61 779.54,836.61 U4.4 797.25,856.3 866.14,925.2 866.14,1210.63 687.4,1389.37 687.4,1789.76 v1(708.66,1811.02) 728.35,1830.71 964.57,1830.71 1020.87,1887.01 P4.3 1884.65,1781.5 1899.61,1781.5 ; P4.13 1899.61,1007.48 1899.61,1781.5 ; P4.25 2073.62,1781.5 1899.61,1781.5
SERVO_KNOB: C16.1 RV2.2 U5.19 | length 1518.1
  Bottom Layer w11.81: U5.19 737.5,4375.89 566.73,4375.89 537.5,4346.66 537.5,4305.31 738.19,4104.62 738.19,3346.46 764.35,3320.3 C16.1 RV2.2
SERVO_PWM: P5.1 U5.12 | length 1711.3
  Bottom Layer w11.81: U5.12 2101.57,4925.98 2263.78,4763.78 P5.1
STEP: U6.7 U7.8 | length 2632.4
  Bottom Layer w11.81: U6.7 4945.19,4804.69 4945.19,4782.15 5094.13,4633.2 5593.17,4633.2 6339.46,3886.92 6339.46,3515.83 6551.35,3303.94 U7.8 U7.8@6607.48,3303.94
STEPPER_RESET: R21.2 U6.5 U7.7 | length 2806.8
  Bottom Layer w11.81: U6.5 4890.83,5059.06 R21.2 4964,4789.94 5101.92,4652.02 5600.96,4652.02 5609.06,4643.92 6358.27,3894.71 6358.27,3523.62 6477.95,3403.94 U7.7
SWITCHED_72: C1.2 C10.2 C11.2 C22.2 C23.2 C28.2 F2.1 F3.1 F5.1 Q1.5 Q1.6 U1.3 U5.24 U7.24 U8.3 | length 16399.2
  Bottom Layer w39.37: 137.8,4330.71 142.52,4325.98 U5.24 ; 4641.73,4429.13 4973.54,4429.13 5087.75,4543.35 5557.13,4543.35 6018.9,4081.58 U7.24 ; C1.2 4847.42,2373.62 U1.3 U1.3@4950.79,2381.57
  Bottom Layer w78.74: 433.07,1574.8 492.13,1515.75 492.13,1250 464.7,1222.57 F2.1 ; U1.3@4950.79,2381.57 4950.79,2854.33
  Bottom Layer w118.11: 4641.73,4429.13 F5.1
  Bottom Layer w196.85: 433.07,1574.8 433.07,2696.85 137.8,2992.13 ; 1299.21,5501.97 1266.84,5469.6 1266.84,5302.28 1141.73,5177.17 280.75,5177.17 137.8,5034.21 137.8,4330.71 137.8,2992.13 ; 3385.83,2992.13 137.8,2992.13 ; 3818.9,3464.57 3405.51,3464.57 ; 4641.73,4429.13 3405.51,4429.13 3405.51,3464.57 ; 4950.79,2854.33 3543.31,2854.33 3405.51,2992.13 3405.51,3464.57
VDD_5_S: C17.2 F4.2 P6.7 P6.15 P6.22 R14.2 RV2.1 | length 5328.9
  Top Layer w11.81: v1(1882.68,3307.09) P6.15 ; R14.2 2570.3,5787.4 v1(2598.43,5787.4)
  Bottom Layer w11.81: RV2.1 785.74,3149.61 935.04,3149.61 1092.52,3307.09 v1(1882.68,3307.09) ; P6.15 2027.56,3555.12 2027.56,4022.55 2058.46,4053.45 2104.63,4053.45 2135.83,4084.65 2135.83,4146.85 P6.22 2600,4724.41 3011.81,4724.41 3013.28,4725.87 3047.2,4725.87 3101.27,4779.94 3101.27,5336.7 2650.56,5787.4 v1(2598.43,5787.4)
  Bottom Layer w39.37: F4.2 1770.08,4212.6 P6.7 1982.5,4203.54 C17.2 2073.45,4209.23 P6.22
VDD_5_ST: C30.1 C31.1 F6.2 P10.3 P10.4 P11.4 R29.1 R30.1 R32.2 RV3.1 S2.1 S2.2 S2.3 U6.6 U6.10 U9.2 U10.2 | length 14400.1
  Top Layer w11.81: R32.2 v1(4429.13,5807.09)
  Top Layer w39.37: v1(5855.51,4153.54) v1(6003.94,4301.97)
  Bottom Layer w11.81: v1(4429.13,5807.09) 4429.13,5771.65 4389.76,5732.28 S2.1 S2.2 S2.3 4443.98,5119.8 4803.15,5119.8 ; U6.6 4803.15,5046.73 4803.15,5119.8 ; 5601.18,4704.72 5570.19,4673.73 5106.81,4673.73 5000,4780.54 5000,5098.43 4978.63,5119.8 4803.15,5119.8
  Bottom Layer w29.53: v1(6003.94,4301.97) 6682.28,4301.97 6751.97,4232.28 7182.68,4232.28 ; U10.2 7182.68,4232.28 ; R30.1 8586.05,3920.69 8681.1,4015.75 ; R29.1 8677.73,5436.44 8681.1,5433.07 ; RV3.1 9212.6,1819.2 9212.6,2559.06 8681.1,3090.55 8681.1,4015.75 ; 7182.68,4232.28 U9.2 7284.25,5688.98 8602.36,5688.98 8681.1,5610.24 8681.1,5433.07 ; 8681.1,4015.75 8681.1,5433.07
  Bottom Layer w39.37: F6.2 5295.28,3287.4 5311.59,3303.72 C31.1 C31.1@5402.58,3312.6 ; U6.10 5387.68,4862.2 5443.7,4862.2 5601.18,4704.72 v1(6003.94,4301.97) ; P10.4 P10.3 C31.1@5402.58,3312.6 ; v1(5855.51,4153.54) P11.4 5403.72,3812.6 C30.1 5403.54,3313.56 C31.1@5402.58,3312.6
VDD_72HP_S: C12.1 C13.1 C14.1 C15.1 C18.1 C19.1 C20.1 C21.1 F3.2 P5.2 P6.14 R13.2 | length 4963.2
  Top Layer w11.81: R13.2 2570.3,5866.14 v1(2598.43,5866.14)
  Bottom Layer w11.81: v1(2598.43,5866.14) 3120.08,5344.49 3120.08,4606.3
  Bottom Layer w39.37: C21.1 C20.1 C19.1 C18.1 ; F3.2 C18.1 ; P6.14 1775.37,3507.31 C18.1
  Bottom Layer w78.74: F3.2 1920.36,3399.61 2040.88,3279.09 3079.68,3279.09 3245.19,3444.6 3245.19,3664.26 3120.08,3789.37 3120.08,4606.3 3062.6,4663.78 P5.2
VDD_72HP_ST: C24.1 C25.1 C26.1 C27.1 C32.1 C33.1 C34.1 C35.1 D11.2 F5.2 P11.1 R28.1 R31.2 SW3.P$2 U6.16 | length 4633.9
  Top Layer w11.81: R31.2 v1(4429.13,5885.83)
  Top Layer w118.11: v1(5157.48,4409.45) v1(5196.85,4448.82) v1(5196.85,4763.78) v1(5196.85,4803.15)
  Bottom Layer w11.81: R28.1 3710.63,3769.69 3688.58,3791.73 SW3.P$2 4788.98,3938.58 F5.2 ; v1(4429.13,5885.83) 4448.82,5885.83 4775.59,5559.06 5156.35,5559.06 C27.1
  Bottom Layer w39.37: F5.2 5098.99,4137.23 C35.1 C34.1 C33.1 C32.1@5380.49,4137.23 ; D11.2 5403.54,4091.28 5403.54,4114.17 C32.1@5380.49,4137.23 ; P11.1 5489.94,4137.23 C32.1 C32.1@5380.49,4137.23
  Bottom Layer w118.11: F5.2 5043.31,4295.28 v1(5196.85,4448.82) ; v1(5196.85,4763.78) 5196.85,5413.39 5255.91,5472.44
  other v1: 5118.11,4409.45 5196.85,4409.45 5157.48,4448.82 5236.22,4448.82 5157.48,4763.78 5236.22,4763.78 5157.48,4803.15 5236.22,4803.15
VDDA: C6.2 C7.2 F2.2 P4.17 P4.28 U3.3 VM2.2 VM3.2 VM4.2 VM5.2 | length 7627.5
  Top Layer w19.68: v1(787.4,1870.08) VM2.2 ; VM5.2 v1(3444.88,275.59) ; VM4.2 v1(3444.88,1161.42) ; v1(3444.88,1870.08) VM3.2
  Bottom Layer w19.68: U3.3 722.65,1314.75 649.61,1387.8 649.61,1870.08 v1(787.4,1870.08) 971.77,1870.08 1011.44,1909.76 1683.07,1909.76 1683.07,2125.98 1732.28,2175.2 1990.95,2175.2 P4.28 2133.46,2087.01 2236.22,1984.25 3244.09,1984.25 3267.72,2007.87 3307.09,2007.87 v1(3444.88,1870.08) v1(3444.88,1161.42) 3444.88,905.51 ; P4.17 2156.39,909.76 3440.64,909.76 3444.88,905.51 ; v1(3444.88,275.59) 3444.88,905.51
  Bottom Layer w39.37: C7.2 C6.2 ; F2.2 626.12,968.5 C6.2 ; U3.3 673.54,1113.78 C6.2
VDDA5: C5.2 C8.1 C9.2 C36.2 R6.1 R11.2 U3.2 U4.5 | length 540
  Top Layer w11.81: v1(1307.09,1102.36) 1338.58,1102.36 1358.27,1082.68 R11.2
  Bottom Layer w11.81: R6.1 731.72,803.72 757.87,777.56 830.7,777.56 U4.5 ; C36.2 1252.67,1102.36 v1(1307.09,1102.36)
  Bottom Layer w19.68: U4.5 925.89,818.91 C8.1
  Bottom Layer w39.37: C8.1 941.08,901.71
pads on no net: P2.2 P4.5 P4.6 P4.7 P4.8 P4.9 P4.10 P4.19 P4.20 P4.21 P4.22 P4.23 P4.24 P6.1 P6.2 P6.3 P6.4 P6.5 P6.6 P6.23 P6.24 P6.25 P6.26 P6.27 P6.28 RV1.0 RV2.0 RV3.0 S1.0 SW1.1 SW2.1 SW3.1 U5.1 U5.2 U5.3 U5.5 U5.6 U5.7 U5.10 U5.11 U5.15 U5.16 U5.17 U5.18 U5.20 U5.22 U6.1 U7.1 U7.2 U7.3 U7.16 U7.19 U7.20 U7.21 U7.22 U9.7 U9.8 U9.9 U9.10 U10.7 U10.8 U10.9 U10.10 VM1.0 VM2.0 VM3.0 VM4.0 VM5.0

## Polygon pours and split planes (outlines as drawn)
SWITCHED_72 on Bottom Layer "gnd_bottom" (solid, pour order 0): 4232.28,3405.51 4173.23,3405.51 4153.54,3425.2 3917.32,3425.2 3799.21,3425.2 3799.21,3562.99 4212.6,3562.99 4311.02,3464.57 4311.02,3405.51
VDD_72HP_ST on Bottom Layer "gnd_bottom" (solid, pour order 2): 5098.43,5590.55 5452.76,5590.55 5452.76,5423.23 5098.43,5423.23
VDDA5 on Bottom Layer "gnd_bottom" (solid, pour order 4): 885.83,1161.42 885.83,875.98 1259.84,875.98 1259.84,1092.52 1033.46,1092.52 964.57,1161.42
GND on Bottom Layer "GND_L02_P012" (solid, pour order 12): 19.68,5980.32 19.69,2996.06 4275.59,2996.06 4503.94,2767.72 5007.87,2767.72 8795.28,2767.72 8795.28,59.06 9980.32,59.06 9980.31,5980.31
AGND on Bottom Layer "AGND_L02_P014" (solid, pour order 14): 4370.08,55.12 8779.53,55.12 8779.53,2744.09 4370.08,2744.09
AGND on Bottom Layer "AGND_L02_P016" (solid, pour order 16): 4350.39,55.12 4350.39,2720.47 4118.11,2952.76 19.68,2952.76 19.68,55.12
AGND on Top Layer "AGND_L01_P006" (solid, pour order 6): 19.68,55.12 19.68,2952.76 4330.71,2952.76 4350.39,2952.76 4350.39,2933.07 4350.39,55.12
AGND on Top Layer "AGND_L01_P008" (solid, pour order 8): 4370.08,2744.09 4370.08,55.12 8779.53,55.12 8779.53,94.49 8779.53,2744.09
GND on Top Layer "GND_L01_P010" (solid, pour order 10): 19.68,2992.13 19.68,5980.31 9980.32,5980.32 9980.31,55.12 8807.09,55.12 8807.09,2763.78 4525.2,2763.78 4287.72,2992.13

## Other copper
Bottom Layer:
  rectangle net SWITCHED_72: 1574.8,2992.13 1751.97,3267.72
  rectangle net NetC2_2: 5059.06,2185.04 5413.39,2736.22
  rectangle net NetC29_2: 4330.71,2972.44 4685.04,3720.47
  region net NetP3_1: 1161.42,5462.6 1023.62,5462.6 1023.62,5383.86 1161.42,5383.86
  region net SWITCHED_72: 1082.68,5561.02 1082.68,5482.28 1181.1,5482.28 1190.94,5472.44 1190.94,5403.54 1289.37,5403.54 1289.37,5600.39 1122.05,5600.39
  region net NetQ1_1: 964.57,5484.25 964.57,5507.87 767.72,5507.87 767.72,5385.83 964.57,5385.83 964.57,5409.45 850.39,5409.45 826.77,5433.07 826.77,5460.63 850.39,5484.25

## Text inside footprints (layer, text, board x,y; h text height)
SW1: Top Overlay "-" at 7068.07,1263.78 h42.5; Top Overlay "+" at 6843.07,1263.78 h42.5
SW2: Top Overlay "-" at 3938.58,4952.17 h42.5; Top Overlay "+" at 3713.58,4952.17 h42.5
SW3: Top Overlay "-" at 3938.58,3613.58 h42.5; Top Overlay "+" at 3713.58,3613.58 h42.5
U9: Mechanical 16 "1" at 6992.52,5577.17 h62
U10: Mechanical 16 "1" at 6992.52,4077.17 h62